# Altium PCB AVCC_PROJECT.PcbDoc
Units mm, origin at the board's own origin, x right, y up, seen from the top; angles counter-clockwise.
Board outline 105.54 x 87.25 mm, 2 copper layers (Top Layer, Bottom Layer); 117 components, 77 nets, 351 pads, 73 vias.
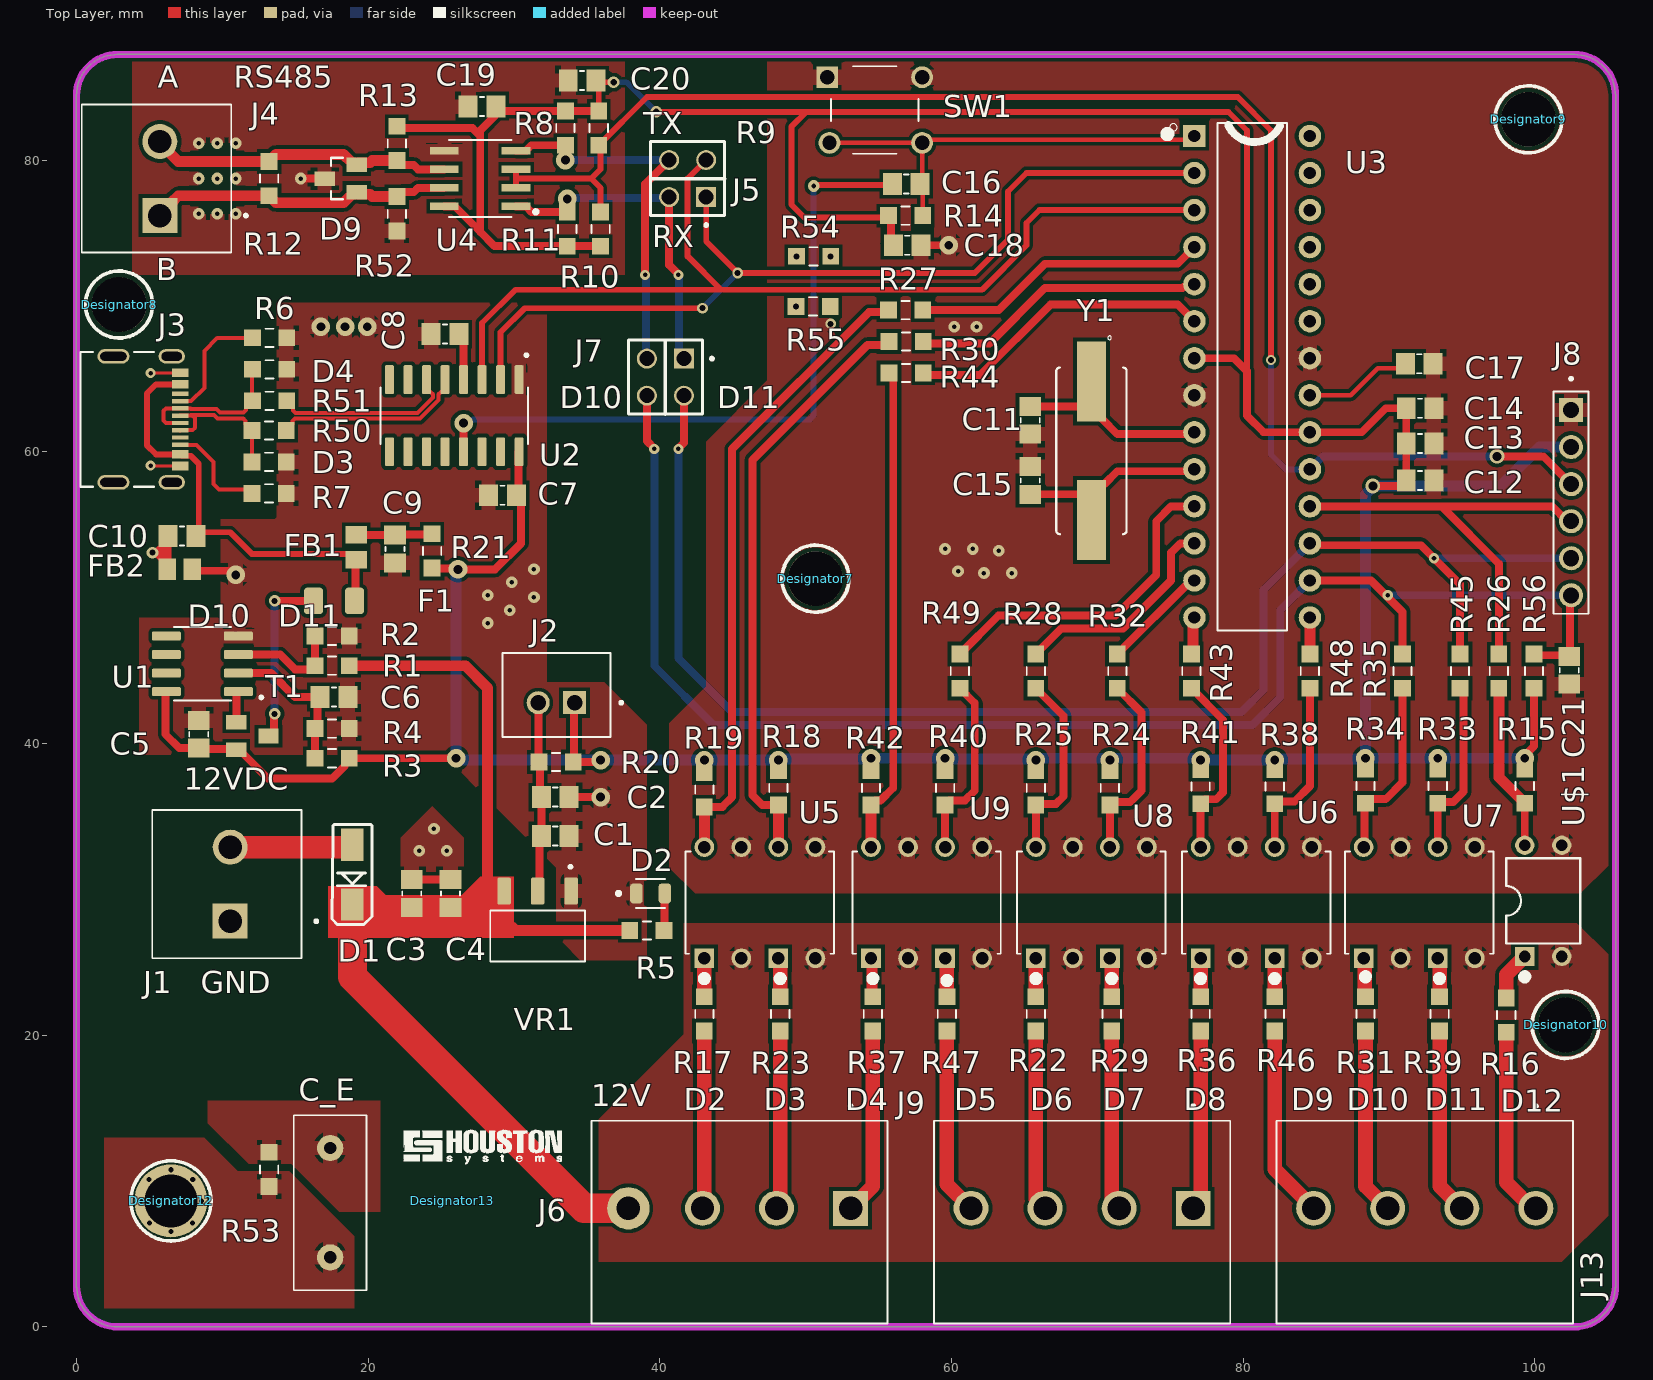
[diagram p0: Top Layer view]
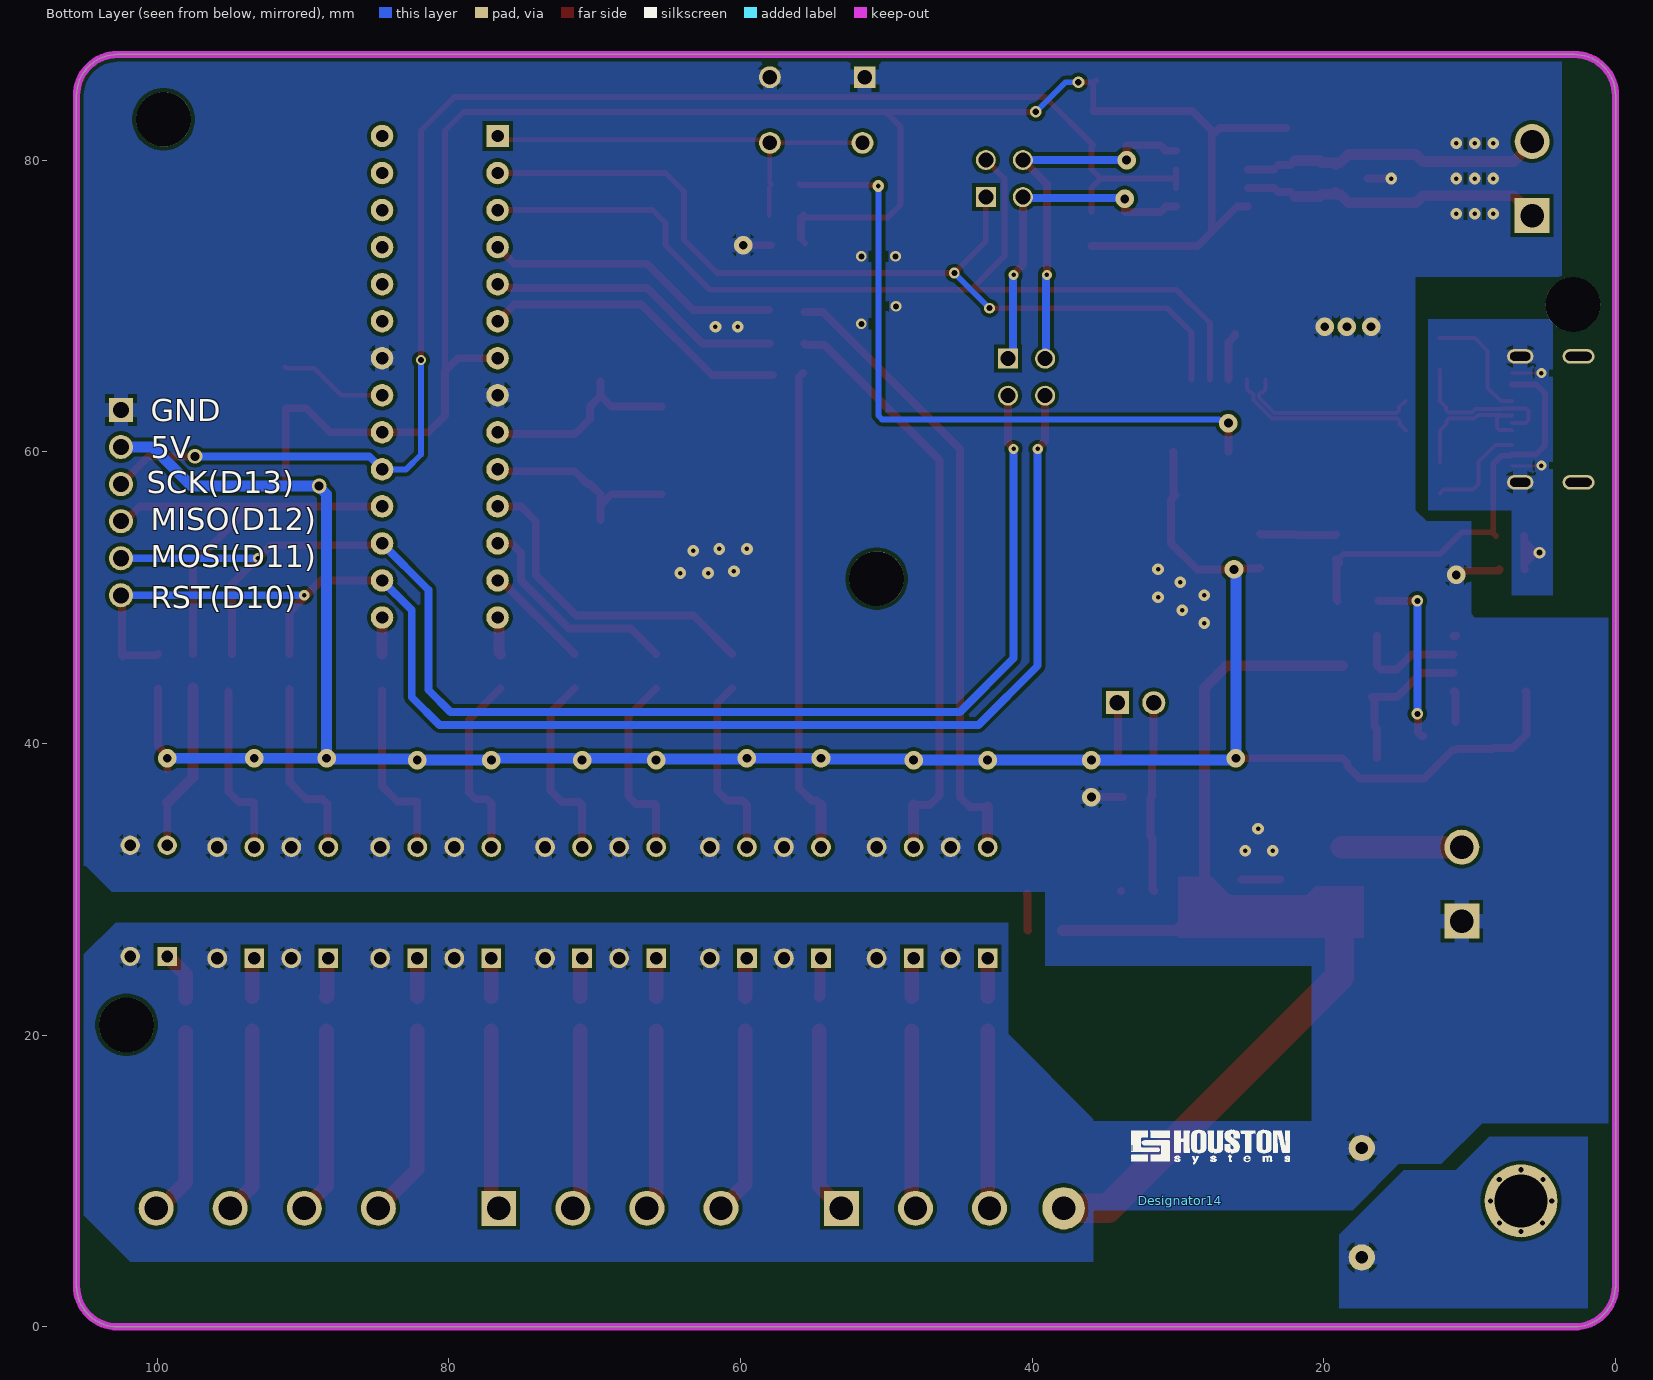
[diagram p1: Bottom Layer view, seen from below]
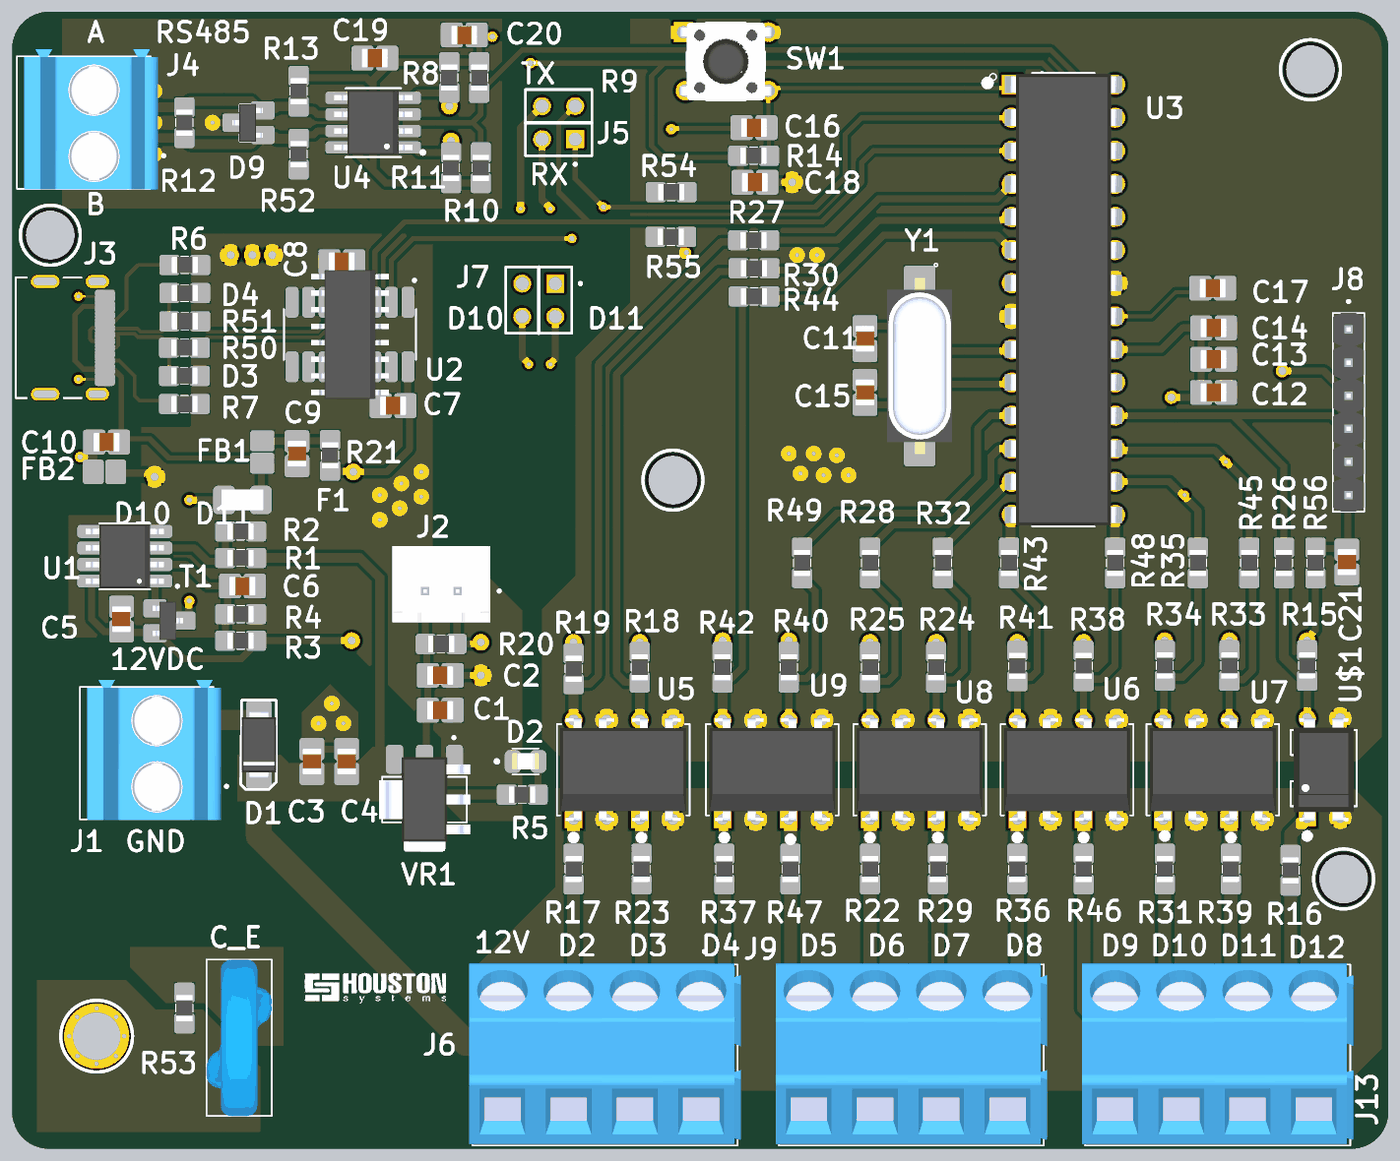
[diagram p2: 3D render of the assembled board from above, using the file's embedded part models]

## Layer stack, top to bottom
Top Solder: solder mask 0.0102, Solder Resist, Dk 3.5
Top Layer: signal copper 0.0356
Dielectric 1: dielectric 0.32, FR-4, Dk 4.8
Bottom Layer: signal copper 0.0356
Bottom Solder: solder mask 0.0102, Solder Resist, Dk 3.5

## Board outline
0,2.815 0,84.434 cw(c2.815,84.434) 2.815,87.249 102.722,87.249 cw(c102.722,84.434) 105.537,84.434 105.537,2.815 cw(c102.722,2.815) 102.722,0 2.815,0 cw(c2.815,2.815)

## Design rules (kind name [scope] priority, off if disabled: settings)
Clearance [All] p1: gap=0.254 ignorepadtopadclearanceinfootprint=FALSE except(0.1: Arc-Arc Arc-Track Arc-SMDPad Track-Track Track-SMDPad SMDPad-SMDPad)
DiffPairsRouting [InDifferentialPairClass('DIFF_90E')] p1: maxlimit=0.127 minlimit=0.127 mostfreqgap=0.127 toplayer_minwidth=0.277 toplayer_maxwidth=0.277 toplayer_prefwidth=0.277 bottomlayer_minwidth=0.277 bottomlayer_maxwidth=0.277 bottomlayer_prefwidth=0.277 impedanceprofiledriven=TRUE impedanceprofileid={61A0B16F-B477-4809-B491-3CA5D92DA443} impedanceprofilevalue=90.000000 maxuncoupledlength=12.7
HoleSize [All] p1: absolutevalues=TRUE maxlimit=5.54 minlimit=0.25 maxpercent=80.000 minpercent=20.000
HoleToHoleClearance [All] p1: gap=0.1 allowstackedmicrovias=TRUE
MinimumSolderMaskSliver [All] p1: minsoldermaskwidth=0.01
PasteMaskExpansion [All] p1: expansion=0.2
PlaneConnect [All] p1: planeconnectstyle=Relief reliefexpansion=0.508 reliefentries=4 reliefconductorwidth=0.454 reliefairgap=0.254
PolygonConnect [All] p1: connectstyle=Relief reliefconductorwidth=1 reliefentries=4 polygonreliefangle="90 Angle" airgapwidth=0.254
RoutingVias [All] p1: holewidth=0.411 width=0.7 viastyle="Through Hole" minholewidth=0.311 minwidth=0.5 maxholewidth=2 maxwidth=2.5
ShortCircuit [All] p1: allowed=TRUE
SilkToSilkClearance [All] p1: silktosilkclearance=0.01
SilkToSolderMaskClearance [IsPad] p1: minsilkscreentomaskgap=0.01 clearancetoexposedcopper=TRUE
SolderMaskExpansion [All] p1: expansion=0.202 istentingtop=FALSE
SupplyNets "Schematic Supply Nets_1" [InNet('GND')] p1: voltage=0.000
SupplyNets "Schematic Supply Nets_5" [InNet('+12')] p2: voltage=0.000
SupplyNets "Schematic Supply Nets_3" [InNet('VUSB')] p3: voltage=0.000
SupplyNets "Schematic Supply Nets_2" [InNet('+5')] p4: voltage=0.000
SupplyNets "Schematic Supply Nets" [InNet('+5DC')] p5: voltage=0.000
Width [All] p1: maxlimit=2 minlimit=0.2 preferedwidth=0.54
21 further rules are at their usual default settings.

## Classes and differential pairs
differential pair class DIFF_90E: USBD V_USBD
component class RS485_3: C11 C12 C13 C14 C15 C17 D9 J4 J5 J6 J9 J13 R8 R9 R10 R11 R12 R13 R15 R16 R17 R18 R19 R22 R23 R24 R25 R26 R28 R29 R31 R32 R33 R34 R35 R36 R37 R38 R39 R40 R41 R42 R43 R45 R46 R47 R48 R49 SW1 U3 U4 U5 U6 U7 U8 U9 U$1 Y1
component class RS485_2: C1 C2 C3 C4 C5 C6 C7 C8 C9 C10 D1 D2 D3 D4 F1 FB1 FB2 J2 J3 R1 R2 R3 R4 R5 R6 R7 R20 R21 R50 R51 T1 U1 U2 VR1
differential pair USBD: +USBD_P -USBD_N
differential pair V_USBD: +V_USBD_P -V_USBD_N

## Components (designator, comment, footprint, x,y, rotation, side; value= is the part's Value field where it differs from the comment)
C1 "CAP CER 10uF 5%" "CAP CER 100pF 5%" 32.827,33.655 r0 top
C2 "CAP CER 100nF 5%" "CAP CER 100pF 5%" 32.827,36.322 r0 top
C3 "CAP CER 10uF 5%" "CAP CER 100pF 5%" 22.987,29.718 r90 top
C4 "CAP CER 100nF 5%" "CAP CER 100pF 5%" 25.654,29.718 r90 top
C5 "CAP CER 100nF 5%" "CAP CER 100pF 5%" 8.382,40.64 r90 top
C6 "CAP CER 100nF 5%" "CAP CER 100pF 5%" 17.653,43.18 r0 top
C7 "CAP CER 100nF 5%" "CAP CER 100pF 5%" 29.21,57.023 r180 top
C8 "CAP CER 10nF 5%" "CAP CER 100pF 5%" 25.273,68.072 r180 top
C9 "CAP CER 100nF 5%" "CAP CER 100pF 5%" 21.844,53.34 r270 top
C10 "CAP CER 100nF 5%" "CAP CER 100pF 5%" 7.239,54.229 r180 top
C11 "CAP CER 22pF 5%" "CAP CER 100pF 5%" 65.405,62.164 r90 top
C12 "CAP CER 100nF 5%" "CAP CER 100pF 5%" 92.136,58.039 r0 top
C13 "CAP CER 100nF 5%" "CAP CER 100pF 5%" 92.136,60.579 r0 top
C14 "CAP CER 100nF 5%" "CAP CER 100pF 5%" 92.136,62.992 r0 top
C15 "CAP CER 22pF 5%" "CAP CER 100pF 5%" 65.405,58.039 r270 top
C16 "CAP CER 100nF 5%" "CAP CER 100pF 5%" 56.896,78.359 r0 top
C17 "CAP CER 100nF 5%" "CAP CER 100pF 5%" 92.075,66.04 r0 top
C18 "CAP CER 100nF 5%" "CAP CER 100pF 5%" 56.962,74.168 r0 top
C19 "CAP CER 10nF 5%" "CAP CER 100pF 5%" 27.813,83.693 r180 top (schematic designator C8)
C20 "CAP CER 10nF 5%" "CAP CER 100pF 5%" 34.671,85.471 r180 top (schematic designator C8)
C21 "CAP CER 100nF 5%" "CAP CER 100pF 5%" 102.362,45.019 r90 top (schematic designator C13)
C_E "Comment" "Ceramic capacitor 3300pF4KV" 17.399,8.509 r270 top
D1 "Diode DO-214AC" "Diode DO-214AC" 18.923,31.006 r90 top
D2 "LED-0805" LED-0805 39.37,29.718 r0 top
D3 "0805" "TVS Diode,Uni-Directional, 4-Pin" 13.208,59.309 r180 top
D4 "0805" "TVS Diode,Uni-Directional, 4-Pin" 13.24,65.659 r180 top
D9 "TVS DIODE SOT-23 SM712-02HTG" "TVS Diode SOT23" 18.118,78.74 r90 top (schematic designator D?)
Designator7 "Comment" "ScrewHole_3.75mmD - duplicate" 50.673,51.308 r0 top
Designator8 "Comment" "ScrewHole_3.75mmD - duplicate" 2.921,70.104 r0 top
Designator9 "Comment" "ScrewHole_3.75mmD - duplicate" 99.568,82.804 r0 top
Designator10 "Comment" "ScrewHole_3.75mmD - duplicate" 102.108,20.701 r0 top
Designator12 "Comment" "EARTHING_VIA HOLE_3.65MM" 6.477,8.636 r0 top
Designator13 "Comment" HOUSTON_LOGO 25.781,8.636 r0 top
Designator14 "Comment" HOUSTON_LOGO 29.845,8.636 r180 bottom
F1 "1206" FUSE 17.661,49.784 r0 top
FB1 "Ferrite Bead" "Ferrite Bead" 19.177,53.467 r270 top
FB2 "Ferrite Bead" "Ferrite Bead" 7.083,51.943 r180 top
J1 "Comment" "Terminal Block Connector" 10.541,27.813 r90 top
J2 "2.54mm" JST_2PIN 32.913,43.324 r0 top
J3 "USB Type C" "USB Type C MOLEX" 3.683,62.23 r270 top
J4 "Connector 5.08 mm" "Connector 5.08 mm" 5.715,76.2 r90 top
J5 "4X2 PIN" "4PIN BURGE" 43.18,77.47 r90 top
J6 "4PIN 5.08MM" "TERMINSL SCREW"#1 53.086,8.128 r180 top
J7 "4X2 PIN" "4PIN BURGE" 41.655,66.392 r180 top (schematic designator J5)
J8 "BERGE 6 PIN 2.54mm" "BERGE 6 PIN 2.54mm" 102.489,56.515 r270 top (schematic designator J5)
J9 "4PIN 5.08MM" "TERMINSL SCREW"#2 76.581,8.128 r180 top
J13 "4PIN 5.08MM" "TERMINSL SCREW"#3 100.076,8.128 r180 top
R1 "RES 0805 10K 5%" "RES 0805 10K 5%" 17.526,45.339 r0 top
R2 "RES 0805 10K 5%" "RES 0805 10K 5%" 17.526,47.371 r180 top
R3 "RES 0805 4.3K 5%" "RES 0805 10K 5%" 17.526,38.989 r180 top
R4 "RES 0805 10K 5%" "RES 0805 10K 5%" 17.526,41.021 r180 top
R5 "RES 0805 1K 5%" "RES 0805 10K 5%" 39.116,27.178 r0 top
R6 "RES 0805 5.1K 5%" "RES 0805 10K 5%" 13.24,67.818 r180 top
R7 "RES 0805 5.1K 5%" "RES 0805 10K 5%" 13.208,57.15 r0 top
R8 "RES 0805 10K 5%" "RES 0805 10K 5%" 33.528,82.201 r90 top
R9 "RES 0805 10K 5%" "RES 0805 10K 5%" 35.814,82.201 r90 top
R10 "RES 0805 10K 5%" "RES 0805 10K 5%" 35.941,75.279 r270 top
R11 "RES 0805 10K 5%" "RES 0805 10K 5%" 33.655,75.279 r270 top
R12 "RES 0805 120E 5%" "RES 0805 10K 5%" 13.208,78.74 r90 top
R13 "RES 0805 20K 5%" "RES 0805 10K 5%" 21.971,81.153 r270 top
R14 "RES 0805 10K 5%" "RES 0805 10K 5%" 56.864,76.2 r0 top
R15 "RES 0805 10K 5%" "RES 0805 10K 5%" 99.314,37.084 r90 top
R16 "RES 0805 1K 5%" "RES 0805 10K 5%" 98.044,21.368 r90 top
R17 "RES 0805 1K 5%" "RES 0805 10K 5%" 43.053,21.463 r90 top
R18 "RES 0805 10K 5%" "RES 0805 10K 5%" 48.133,36.957 r90 top
R19 "RES 0805 10K 5%" "RES 0805 10K 5%" 43.053,36.83 r90 top
R20 "RES 0805 0E 5%" "RES 0805 10K 5%" 32.893,38.735 r0 top
R21 "RES 0805 0E 5%" "RES 0805 10K 5%" 24.384,53.213 r90 top
R22 "RES 0805 1K 5%" "RES 0805 10K 5%" 65.786,21.463 r270 top
R23 "RES 0805 1K 5%" "RES 0805 10K 5%" 48.26,21.463 r90 top
R24 "RES 0805 10K 5%" "RES 0805 10K 5%" 70.866,36.957 r90 top
R25 "RES 0805 10K 5%" "RES 0805 10K 5%" 65.786,36.957 r90 top
R26 "RES 0805 0E 5%" "RES 0805 10K 5%" 97.536,44.958 r270 top
R27 "RES 0805 0E 5%" "RES 0805 10K 5%" 56.864,69.723 r180 top
R28 "RES 0805 0E 5%" "RES 0805 10K 5%" 65.786,44.958 r270 top
R29 "RES 0805 1K 5%" "RES 0805 10K 5%" 70.993,21.463 r270 top
R30 "RES 0805 0E 5%" "RES 0805 10K 5%" 56.896,67.564 r180 top
R31 "RES 0805 1K 5%" "RES 0805 10K 5%" 88.392,21.463 r270 top
R32 "RES 0805 0E 5%" "RES 0805 10K 5%" 71.374,44.958 r270 top
R33 "RES 0805 10K 5%" "RES 0805 10K 5%" 93.345,37.084 r90 top
R34 "RES 0805 10K 5%" "RES 0805 10K 5%" 88.392,37.084 r90 top
R35 "RES 0805 0E 5%" "RES 0805 10K 5%" 90.932,44.958 r270 top
R36 "RES 0805 1K 5%" "RES 0805 10K 5%" 77.089,21.463 r90 top
R37 "RES 0805 1K 5%" "RES 0805 10K 5%" 54.61,21.463 r90 top
R38 "RES 0805 10K 5%" "RES 0805 10K 5%" 82.169,37.052 r90 top
R39 "RES 0805 1K 5%" "RES 0805 10K 5%" 93.472,21.463 r270 top
R40 "RES 0805 10K 5%" "RES 0805 10K 5%" 59.563,36.957 r90 top
R41 "RES 0805 10K 5%" "RES 0805 10K 5%" 77.089,37.052 r90 top
R42 "RES 0805 10K 5%" "RES 0805 10K 5%" 54.483,36.957 r90 top
R43 "RES 0805 0E 5%" "RES 0805 10K 5%" 76.454,44.958 r270 top
R44 "RES 0805 0E 5%" "RES 0805 10K 5%" 56.896,65.405 r180 top
R45 "RES 0805 0E 5%" "RES 0805 10K 5%" 94.869,44.958 r270 top
R46 "RES 0805 1K 5%" "RES 0805 10K 5%" 82.169,21.463 r90 top
R47 "RES 0805 1K 5%" "RES 0805 10K 5%" 59.69,21.463 r270 top
R48 "RES 0805 0E 5%" "RES 0805 10K 5%" 84.582,44.958 r270 top
R49 "RES 0805 0E 5%" "RES 0805 10K 5%" 60.579,44.958 r270 top
R50 "RES 0805 22E 5%" "RES 0805 10K 5%" 13.208,61.468 r0 top
R51 "RES 0805 22E 5%" "RES 0805 10K 5%" 13.24,63.5 r0 top
R52 "RES 0805 20K 5%" "RES 0805 10K 5%" 21.971,76.327 r90 top (schematic designator R13)
R53 "RES 0805 1K 5%" "RES 0805 10K 5%" 13.208,10.795 r90 top (schematic designator R17)
R54 "RES 0805 10K 5%" "RES 0805 10K 5%" 50.546,73.406 r180 top (schematic designator R18)
R55 "RES 0805 10K 5%" "RES 0805 10K 5%" 50.514,69.977 r180 top (schematic designator R18)
R56 "RES 0805 0E 5%" "RES 0805 10K 5%" 99.949,44.958 r270 top (schematic designator R26)
SW1 "PUSH BUTTON" "Push Button" 54.737,83.439 r0 top
T1 "P-MOS SI2301" PMOS_SOT23 12.065,40.513 r270 top
U1 "SOIC-8" OPAMP 8.636,45.466 r180 top
U2 "HC340C" HC340C 25.908,62.484 r270 top
U3 "ATMEGA328P-PU" "ATMEGA328P DIP28" 80.622,65.151 r0 top
U4 "MAX485CSA-RS-485/RS-422 Transceivers" "MAX485CSA-RS-485/RS-422 Transceivers" 27.686,78.74 r180 top
U5 "OPTOCOUPLER" OPTOCOUPLER 46.863,29.083 r90 top
U6 "OPTOCOUPLER" OPTOCOUPLER 69.596,29.083 r90 top
U7 "OPTOCOUPLER" OPTOCOUPLER 92.075,29.083 r90 top
U8 "OPTOCOUPLER" OPTOCOUPLER 80.899,29.083 r90 top
U9 "OPTOCOUPLER" OPTOCOUPLER 58.293,29.083 r90 top
U$1 "Optoc_4pin" Optoisolator 100.584,29.21 r0 top
VR1 "LM1117IMPX-5.0" LM1117IMPX-5.0 31.623,26.797 r270 top
Y1 "Crystal 16 Mhz SMD" "Crystal 16 Mhz SMD" 69.596,60.071 r270 top

## Footprints (in the part's own frame and the unit in brackets; to place one, negate y for a bottom-side part, rotate by r counter-clockwise, add the part's x,y. Pads: shape width x height; smd on the part's side, far side on the other; paste and mask are expansions set on the pad)
"4PIN BURGE" [mm] "Connector Header Through Hole 4 position 0.100 (2.54mm), 4X2 PIN"
  rect 1.37x1.37 hole 1.02: 01(0,0)
  round 1.37 hole 1.02: 02(0,2.54) 03(2.54,0) 04(2.54,2.54)
  silkscreen extent -2.02,-1.27 3.81,3.81
"ATMEGA328P DIP28" [mm] "ATMEGA328P DIP28 DIP794W46P254L2967H457Q28B"
  rect 1.54x1.54 hole 0.85: 1(-3.96,16.51)
  round 1.54 hole 0.85: 2(-3.96,13.97) 3(-3.96,11.43) 4(-3.96,8.89) 5(-3.96,6.35) 6(-3.96,3.81) 7(-3.96,1.27) 8(-3.96,-1.27) 9(-3.96,-3.81) 10(-3.96,-6.35) 11(-3.96,-8.89) 12(-3.96,-11.43) 13(-3.96,-13.97) 14(-3.96,-16.51) 15(3.96,-16.51) 16(3.96,-13.97) 17(3.96,-11.43) 18(3.96,-8.89) 19(3.96,-6.35) 20(3.96,-3.81) 21(3.96,-1.27) 22(3.96,1.27) 23(3.96,3.81) 24(3.96,6.35) 25(3.96,8.89) 26(3.96,11.43) 27(3.96,13.97) 28(3.96,16.51)
  silkscreen extent -5.65,-17.4 2.38,17.4, body extent -5.08,-17.34 5.08,17.34, height 4.57
"BERGE 6 PIN 2.54mm" [mm] "BERGE 6 PIN 2.54mm, AMPHENOL_68604-406HLF"
  rect 1.65x1.65 / inner round 1.65 / far side rect 1.65x1.65 hole 1.1: 1(-6.35,0)
  round 1.65 hole 1.1: 2(-3.81,0) 3(-1.27,0) 4(1.27,0) 5(3.81,0) 6(6.35,0)
  silkscreen extent -8.6,-1.2 7.62,1.2, body extent -7.62,-1.2 7.62,1.2, height 12.19
"CAP CER 100pF 5%" [mm] "CAP CER 100PF50V X7R 0805"
  rect 1.3x1.5 smd: 1(-0.95,0) 2(0.95,0)
  silkscreen extent -0.15,-0.65 0.15,0.65, body extent -1,-0.72 1,0.72, height 1.22
"Ceramic capacitor 3300pF4KV" [mm] "Ceramic capacitor 3300pF4KV, Tension nominale 400Vac(r.m.s.), 4KV ESD, DE2E3SA332MA3BY02F"
  round 1.8 hole 0.85: 1(-3.75,0) 2(3.75,0)
  silkscreen extent -6,-2.5 6,2.5, body extent -6,-2.5 6,2.5, height 15
"Connector 5.08 mm" [mm] "MOLEX,Screw Type, Horizontal, 5.08 Pitch, 24~12 (AWG), Terminal Block Connector"
  rect 2.4x2.4 / inner round 2.4 / far side rect 2.4x2.4 hole 1.6: 1(0,0)
  round 2.4 hole 1.6: 2(5.08,0)
  silkscreen extent -2.54,-6 7.62,5.35, body extent -2.59,-5.46 8.17,4.79, height 14
"Crystal 16 Mhz SMD" [mm] "16 Mhz Crystal SMD –CSM-4ALX(28ALX) 12.5mmX4.85mmX4mm"
  rect 5.5x2 smd: 1(-4.75,0) 2(4.75,0)
  silkscreen extent -7.88,-2.41 5.72,2.41, body extent -6.75,-2.5 6.75,2.5, height 4.5
"Diode DO-214AC" [mm] "Diode Standard 100 V 1A Surface Mount DO-214AC (SMA)"
  rect 2.2x1.55 smd: 1(-2.05,0) 2(2.05,0)
  silkscreen extent -3.43,-1.33 3.43,1.4, body extent -2.55,-1.33 2.55,1.33, height 2.29
"EARTHING_VIA HOLE_3.65MM" [mm] "EARTHING VIA HOLE 3.65MM"
  round 0.45 hole 0.35: 2(-2.108,0) 2(-1.499,1.473) 2(-1.473,-1.524) 2(0,-2.108) 2(0,2.134) 2(1.473,-1.524) 2(1.499,1.473) 2(2.108,0)
  round 5 hole 3.65: 2(0,0)
  silkscreen extent -2.75,-2.75 2.75,2.75
"Ferrite Bead" [mm] "Ferrite Bead 0805"
  rect 1.2x1.47 smd: 1(-0.86,0) 2(0.86,0)
FUSE [mm] "C1H25 .5 A 125 V AC 32 V DC Fuse Board Mount (Cartridge Style Excluded) Surface Mount 1206 (3216 Metric)"
  rrect30% 1.3x1.8 smd: 1(-1.405,0) 2(1.405,0)
  body extent -1.6,-0.79 1.6,0.79, height 0.85
HC340C [mm] "FTDI 16-SOIC"
  rrect25% 1.97x0.6 smd: 1(-2.475,4.445) 2(-2.475,3.175) 3(-2.475,1.905) 4(-2.475,0.635) 5(-2.475,-0.635) 6(-2.475,-1.905) 7(-2.475,-3.175) 8(-2.475,-4.445) 9(2.475,-4.445) 10(2.475,-3.175) 11(2.475,-1.905) 12(2.475,-0.635) 13(2.475,0.635) 14(2.475,1.905) 15(2.475,3.175) 16(2.475,4.445)
  silkscreen extent -4.24,-5.06 1.95,5.06, body extent -3,-4.95 3,4.95, height 1.75
HOUSTON_LOGO [mm]
  silkscreen extent -3.35,2.52 7.49,4.87
JST_2PIN [mm] "B2B-XH-A(LF)(SN),Connector Header Through Hole 3 position 0.098 (2.50mm)Connector Header Through Hole 2 position 0.098 (2.50mm)"
  rect 1.575x1.575 / inner round 1.575 / far side rect 1.575x1.575 hole 1.05: 1(1.25,-0.525)
  round 1.575 hole 1.05: 2(-1.25,-0.525)
  silkscreen extent -3.7,-2.88 4.54,2.88, body extent -3.7,-2.88 3.7,2.88, height 7
LED-0805 [mm] "Red 640nm LED Indication - Discrete 1.85V 0805 (2012 Metric)"
  rrect50% 0.86x1.36 smd: A(0.975,0) C(-0.975,0)
  silkscreen extent -2.3,-0.99 1,0.99, body extent -1,-0.63 1,0.63, height 0.75
LM1117IMPX-5.0 [mm]
  rrect25% 1.84x0.93 smd: 1(-3.085,2.3) 2(-3.085,0) 3(-3.085,-2.3)
  rrect25% 1.84x3.19 on Top Overlay: 4(3.085,0)
  silkscreen extent -4.85,-3.25 1.75,3.25, body extent -3.5,-3.25 3.5,3.25, height 1.8
"MAX485CSA-RS-485/RS-422 Transceivers" [mil] "Low-Power, Slew-Rate-Limited RS-485/RS-422 Transceivers, SOIC-8"
  rect 78x21 smd: 1(-97,75) 2(-97,25) 3(-97,-25) 4(-97,-75) 5(97,-75) 6(97,-25) 7(97,25) 8(97,75)
  silkscreen extent -84,-104 84,104, body extent -118,-96 118,96, height 69
OPAMP [mm] "LMV342MA,Dual, 5.5-V, 1-MHz, high output current (75-mA) op amp,SOIC-8"
  rrect25% 1.97x0.6 smd: 1(-2.47,1.905) 2(-2.47,0.635) 3(-2.47,-0.635) 4(-2.47,-1.905) 5(2.47,-1.905) 6(2.47,-0.635) 7(2.47,0.635) 8(2.47,1.905)
  silkscreen extent -4.14,-2.52 1.95,2.52, body extent -3,-2.45 3,2.45, height 1.75
OPTOCOUPLER [mm] "TLP521-2,Optoisolateur Ã  sortie transistor 5300 Vrms 2 canaux 8 DIP"
  rect 1.35x1.35 / inner round 1.35 / far side rect 1.35x1.35 hole 0.85: 1(-3.81,3.81)
  round 1.35 hole 0.85: 2(-3.81,1.27) 4(-3.81,-3.81) 5(3.81,-3.81) 6(3.81,-1.27) 7(3.81,1.27) 8(3.81,3.81)
  rect 1.35x1.35 hole 0.85: 3(-3.81,-1.27)
  silkscreen extent -5.31,-5.09 3.5,5.09, body extent -3.94,-4.83 3.94,4.83, height 4.85
Optoisolator [mil] "TLP521-1,Optoisolator Transistor Output 5300Vrms 1 Channel 4-DIP"
  rect 52x52 hole 32: 1(-50,-150)
  round 52 hole 32: 2(50,-150) 3(50,150) 4(-50,150)
  silkscreen extent -100,-115 100,115, body extent -91,-160 91,150, height 197
PMOS_SOT23 [mm] "MOSFET P-CH 20V 2.2A SOT23-3"
  rect 1x1.4 smd: 1(-0.95,-1.1) 2(0.95,-1.1) 3(0,1.1)
  body extent -1.46,-1.31 1.46,1.06, height 1.25
"Push Button" [mm] "Switch Push Button OFF (ON) SPST Round Button 0.05A 24VDC Momentary Contact PC Pins Thru-Hole"
  rect 1.498x1.498 / inner round 1.498 / far side rect 1.498x1.498 hole 0.99: 1(-3.25,2.25)
  round 1.498 hole 0.99: 2(3.25,2.25) 3(-3.1,-2.25) 4(3.25,-2.25)
  silkscreen extent -3,-3 3,3, body extent -3.9,-3 3.9,3, height 17.01
"RES 0805 10K 5%" [mm] "RESISTOR, THICK FILM, 10K, 5%, 0805, FRESISTOR, THICK FILM, 10K, 5%, 0805, FULL REEL Product Range:PANASONIC - ERJ Series"
  rect 1.15x1.15 smd: 1(-1.175,0) 2(1.175,0)
  silkscreen extent -0.28,-0.63 0.28,0.63, body extent -1,-0.63 1,0.63, height 0.7
"ScrewHole_3.75mmD - duplicate" [mm] "SCREW HEAD DIA 4.5MM, SREW LEG DIA 3 MM"
  round 3.75 hole 3.75 unplated: 1(0,0)
  silkscreen extent -2.3,-2.3 2.3,2.3
"Terminal Block Connector" [mm] "MOLEX,Screw Type, Horizontal, 5.08 Pitch, 24~12 (AWG), Terminal Block Connector"
  rect 2.4x2.4 / inner round 2.4 / far side rect 2.4x2.4 hole 1.6: 1(0,0)
  round 2.4 hole 1.6: 2(5.08,0)
  silkscreen extent -2.54,-6 7.62,5.35, body extent -2.59,-5.46 8.17,4.79, height 14
"TERMINSL SCREW"#1 [mm] "TERMINSL SCREW, 4PIN, 5.08MM"
  rect 2.4x2.4 / inner round 2.4 / far side rect 2.4x2.4 hole 1.6: 1(0,0)
  round 2.4 hole 1.6: 2(5.08,0) 3(10.16,0)
  round 2.9 hole 1.6: 4(15.24,0)
  silkscreen extent -2.54,-7.1 17.78,7.89, body extent -2.79,-6.1 18.03,7.79, height 15.82
"TERMINSL SCREW"#2 [mm] "TERMINSL SCREW, 4PIN, 5.08MM"
  rect 2.4x2.4 / inner round 2.4 / far side rect 2.4x2.4 hole 1.6: 1(0,0)
  round 2.4 hole 1.6: 2(5.08,0) 3(10.16,0) 4(15.24,0)
  silkscreen extent -2.54,-7.1 17.78,7.89, body extent -2.79,-6.1 18.03,7.79, height 15.82
"TERMINSL SCREW"#3 [mm] "TERMINSL SCREW, 4PIN, 5.08MM"
  round 2.4 hole 1.6: 1(0,0) 2(5.08,0) 3(10.16,0) 4(15.24,0)
  silkscreen extent -2.54,-7.1 17.78,7.89, body extent -2.79,-6.1 18.03,7.79, height 15.82
"TVS Diode SOT23" [mm] "TVS Diode, SM712 Series, 31V Clamp, 600W Peak Pulse, Surface Mount,Bi-Directional, SOT23-3"
  rect 1x1.4 smd: 1(-0.95,-1.1) 2(0.95,-1.1) 3(0,1.1)
  silkscreen extent -1.42,-0.15 1.42,0.66, body extent -1.47,-1.13 1.45,1.24, height 1.12
"TVS Diode,Uni-Directional, 4-Pin" [mm] "TVS Diode,Uni-Directional,5V, 0805"
  rect 1.15x1.15 smd: 1(-1.175,0) 2(1.175,0)
  silkscreen extent -0.28,-0.63 0.28,0.63, body extent -1,-0.63 1,0.63, height 0.7
"USB Type C MOLEX" [mm] "USB Type C MOLEX_2171790001"
  rect 0.59x1.15 smd mask+0.064: A1B12(-3.2,3.425) A4B9(-2.4,3.425) B1A12(3.2,3.425) B4A9(2.4,3.425)
  rect 0.298x1.15 smd mask+0.064: A5(-1.25,3.425) A6(-0.25,3.425) A7(0.25,3.425) A8(1.25,3.425) B5(1.75,3.425) B6(0.75,3.425) B7(-0.75,3.425) B8(-1.75,3.425)
  oval 1x2.2 hole 0.6 slot 1.8 at 90 deg mask+0.064: SH1(-4.32,-1.15) SH2(4.32,-1.15)
  oval 1x1.8 hole 0.6 slot 1.4 at 90 deg mask+0.064: SH3(-4.32,2.85) SH4(4.32,2.85)
  silkscreen extent -4.62,-3.4 4.62,1.63

## Part data
C1 C2 C3 C4 C5 C6 C7 C8 C9 C10 C11 C12 C13 C14 C15 C16 C17 C18 C19 C20 C21: library part "CAP CER 100pF 5%", "CAP CER 100PF50V X7R 0805", Package=None, Availability=Unavailable, MP=GCJ216R71H222KA01D, Price=None
D1: "Diode Standard 100 V 1A Surface Mount DO-214AC (SMA)", Package="DO-214 Vishay Semiconductor", Check_prices=https://www.snapeda.com/parts/S1B-E3/61T/Vishay/view-part/?ref=eda, MF="Vishay Semiconductor", MP=S1B-E3/61T, SnapEDA_Link=https://www.snapeda.com/parts/S1B-E3/61T/Vishay/view-part/?ref=snap
D2: "Red 640nm LED Indication - Discrete 1.85V 0805 (2012 Metric)", Package="0805 Kingbright", Check_prices=https://www.snapeda.com/parts/APT2012SRCPRV/Kingbright/view-part/?ref=eda, MF=Kingbright, MP=APT2012SRCPRV, SnapEDA_Link=https://www.snapeda.com/parts/APT2012SRCPRV/Kingbright/view-part/?ref=snap
D3 D4: library part "TVS Diode", "Nexperia PRTR5V0U2X,215, Dual-Element Uni-Directional TVS Diode, 0805, 5V", Package="TO-253-4 Nexperia USA Inc.", Availability="In Stock", Check_prices=https://www.snapeda.com/parts/PRTR5V0U2X/NXP+Semiconductors/view-part/?ref=eda, MF="NXP Semiconductors", MP=PRTR5V0U2X, Price=None, Purchase-URL=https://pricing.snapeda.com/search/part/PRTR5V0U2X/?ref=eda, SnapEDA_Link=https://www.snapeda.com/parts/PRTR5V0U2X/NXP+Semiconductors/view-part/?ref=snap
D9: "TVS Diode, SM712 Series, 31V Clamp, 600W Peak Pulse, Surface Mount,Bi-Directional, SOT23-3", Package="SOT-23 Littelfuse Inc.", Check_prices=https://www.snapeda.com/parts/SM712-02HTG/Littelfuse/view-part/?ref=eda, MF="Littelfuse Inc.", MP=SM712-02HTG, SnapEDA_Link=https://www.snapeda.com/parts/SM712-02HTG/Littelfuse/view-part/?ref=snap
F1: library part FUSE, "C1H25 .5 A 125 V AC 32 V DC Fuse Board Mount (Cartridge Style Excluded) Surface Mount 1206 (3216 Metric)", Package="1206 Bel Fuse Inc.", Check_prices=https://www.snapeda.com/parts/C1H25/Bel+Circuit+Protection/view-part/?ref=eda, MF="Bel Fuse", MP=C1H25, SnapEDA_Link=https://www.snapeda.com/parts/C1H25/Bel+Circuit+Protection/view-part/?ref=snap
FB1 FB2: "Ferrite Bead 0805", Package=None, Availability=Unavailable, MP=MPZ2012S102AT000, Price=None
J2: library part JST_2PIN, "B2B-XH-A(LF)(SN),Connector Header Through Hole 3 position 0.098 (2.50mm)Connector Header Through Hole 2 position 0.098 (2.50mm)", Package=None, Check_prices=https://www.snapeda.com/parts/B2B-XH-A(LF)(SN)/JST/view-part/?ref=eda, MF="JST Sales", MP=B2B-XH-A(LF)(SN), SnapEDA_Link=https://www.snapeda.com/parts/B2B-XH-A(LF)(SN)/JST/view-part/?ref=snap
J3: "USB Type C - Connector, Top-mount SMT, 16pos", Package=None, Check_prices=https://www.snapeda.com/parts/217179-0001/Molex/view-part/?ref=eda, MF=Molex, MP=217179-0001, SnapEDA_Link=https://www.snapeda.com/parts/217179-0001/Molex/view-part/?ref=snap
J4: "MOLEX,Screw Type, Horizontal, 5.08 Pitch, 24~12 (AWG), Terminal Block Connector", Package=None, Check_prices=https://www.snapeda.com/parts/TB007-508-02BE/Same+Sky/view-part/?ref=eda, MF="Same Sky", MP=TB007-508-02BE, SnapEDA_Link=https://www.snapeda.com/parts/TB007-508-02BE/Same+Sky/view-part/?ref=snap
J5 J7: library part "4PIN BURGE", "Connector Header Through Hole 4 position 0.100 (2.54mm), 4X2 PIN", Package=None, Check_prices=https://www.snapeda.com/parts/MTLW-102-05-G-D-180/Samtec/view-part/?ref=eda, MF=Samtec, MP=MTLW-102-05-G-D-180, SnapEDA_Link=https://www.snapeda.com/parts/MTLW-102-05-G-D-180/Samtec/view-part/?ref=snap
J6 J9 J13: library part "TERMINSL SCREW", "TERMINSL SCREW, 4PIN, 5.08MM", Package=None, Availability=Unavailable, MF="{'manufacturer': u'Phoenix Contact'}", MP=1995664, Price=None
J8: "BergStik, Board to Board connector, Unshrouded Vertical Header, Through Hole, Single Row, 6 Positions, 2.54 mm (0.100in) Pitch. 68604-406HLF", Package=None, Check_prices=https://www.snapeda.com/parts/68604-406HLF/Amphenol/view-part/?ref=eda, MF="AMPHENOL ICC / FCI", MP=68604-406HLF, SnapEDA_Link=https://www.snapeda.com/parts/68604-406HLF/Amphenol/view-part/?ref=snap
R1 R2 R4 R8 R9 R10 R11 R14 R15 R18 R19 R24 R25 R33 R34 R38 R40 R41 R42 R54 R55: "RESISTOR, THICK FILM, 10K, 5%, 0805, FRESISTOR, THICK FILM, 10K, 5%, 0805, FULL REEL Product Range:PANASONIC - ERJ Series", Package="805-2 Panasonic", Availability="In Stock", Check_prices=https://www.snapeda.com/parts/ERJ-6GEYJ103V/Panasonic+Electronic+Components/view-part/?ref=eda, MF="Panasonic Electronic", MP=ERJ-6GEYJ103V, Price=None, Purchase-URL=https://pricing.snapeda.com/search/part/ERJ-6GEYJ103V/?ref=eda, SnapEDA_Link=https://www.snapeda.com/parts/ERJ-6GEYJ103V/Panasonic+Electronic+Components/view-part/?ref=snap
R3 R5 R6 R7 R12 R13 R16 R17 R20 R21 R22 R23 R26 R27 R28 R29 R30 R31 R32 R35 R36 R37 R39 R43 R44 R45 R46 R47 R48 R49 R50 R51 R52 R53 R56: library part "RES 0805 10K 5%", "RESISTOR, THICK FILM, 10K, 5%, 0805, FRESISTOR, THICK FILM, 10K, 5%, 0805, FULL REEL Product Range:PANASONIC - ERJ Series", Package="805-2 Panasonic", Availability="In Stock", Check_prices=https://www.snapeda.com/parts/ERJ-6GEYJ103V/Panasonic+Electronic+Components/view-part/?ref=eda, MF="Panasonic Electronic", MP=ERJ-6GEYJ103V, Price=None, Purchase-URL=https://pricing.snapeda.com/search/part/ERJ-6GEYJ103V/?ref=eda, SnapEDA_Link=https://www.snapeda.com/parts/ERJ-6GEYJ103V/Panasonic+Electronic+Components/view-part/?ref=snap
SW1: "Switch Push Button OFF (ON) SPST Round Button 0.05A 24VDC Momentary Contact PC Pins Thru-Hole", Package=None, Check_prices=https://www.snapeda.com/parts/3-1825910-1/TE+Connectivity+ALCOSWITCH+Switches/view-part/?ref=eda, MF="TE Connectivity", MP=3-1825910-1, SnapEDA_Link=https://www.snapeda.com/parts/3-1825910-1/TE+Connectivity+ALCOSWITCH+Switches/view-part/?ref=snap
T1: "MOSFET P-CH 20V 2.2A SOT23-3", Package="SOT-23 MCC", Check_prices=https://www.snapeda.com/parts/SI2301/Micro+Commercial+Components/view-part/?ref=eda, MF="Micro Commercial Components (MCC)", MP=SI2301, SnapEDA_Link=https://www.snapeda.com/parts/SI2301/Micro+Commercial+Components/view-part/?ref=snap
U1: library part OPAMP, "LMV342MA,Dual, 5.5-V, 1-MHz, high output current (75-mA) op amp,SOIC-8", Package="SOIC-8 Texas Instruments", Check_prices=https://www.snapeda.com/parts/LMV342MAX/NOPB/Texas+Instruments/view-part/?ref=eda, MF="Texas Instruments", MP=LMV342MAX/NOPB, SnapEDA_Link=https://www.snapeda.com/parts/LMV342MAX/NOPB/Texas+Instruments/view-part/?ref=snap
U2: "FTDI 16-SOIC", Package="SOIC-16 ON Semiconductor", Check_prices=https://www.snapeda.com/parts/74HC595D/Toshiba/view-part/?ref=eda, MF=Toshiba, MP=74HC595D, SnapEDA_Link=https://www.snapeda.com/parts/74HC595D/Toshiba/view-part/?ref=snap
U3: "ATmega Series 20 MHz 32 KB Flash 2 KB SRAM 8-Bit Microcontroller - DIP-28", Package=None, Availability=Unavailable, MP=ATMEGA328P-PU, Price=None
U4: "Low-Power, Slew-Rate-Limited RS-485/RS-422 Transceivers", Package="SOIC-8 Maxim", Check_prices=https://www.snapeda.com/parts/MAX485CSA+/Analog+Devices/view-part/?ref=eda, MF="Analog Devices", MP=MAX485CSA+, SnapEDA_Link=https://www.snapeda.com/parts/MAX485CSA+/Analog+Devices/view-part/?ref=snap
U5 U6 U7 U8 U9: "TLP521-2,Optoisolateur Ã  sortie transistor 5300 Vrms 2 canaux 8 DIP", Package="DIP-8 Toshiba", Check_prices=https://www.snapeda.com/parts/TLP521-2/Toshiba/view-part/?ref=eda, MF=Toshiba, MP=TLP521-2, SnapEDA_Link=https://www.snapeda.com/parts/TLP521-2/Toshiba/view-part/?ref=snap
U$1: "TLP521-1,Optoisolator Transistor Output 5300Vrms 1 Channel 4-DIP", Package="DIP-4 Isocom Components", Check_prices=https://www.snapeda.com/parts/TLP521-1/Isocom/view-part/?ref=eda, MF=Isocom, MP=TLP521-1, SnapEDA_Link=https://www.snapeda.com/parts/TLP521-1/Isocom/view-part/?ref=snap
VR1: "800-mA 15-V linear voltage regulator", Package="SOT-223-4 Texas Instruments", Check_prices=https://www.snapeda.com/parts/LM1117IMPX-5.0/NOPB/Texas+Instruments/view-part/?ref=eda, MF="Texas Instruments", MP=LM1117IMPX-5.0/NOPB, SnapEDA_Link=https://www.snapeda.com/parts/LM1117IMPX-5.0/NOPB/Texas+Instruments/view-part/?ref=snap
Y1: "16 Mhz Crystal SMD –CSM-4ALX(28ALX) 12.5mmX4.85mmX4mm", Package="HC49SD Fox Electronics", Check_prices=https://www.snapeda.com/parts/FOXSDLF/128-20/Fox+Electronics/view-part/?ref=eda, MF="Fox Electronics", MP=FOXSDLF/128-20, SnapEDA_Link=https://www.snapeda.com/parts/FOXSDLF/128-20/Fox+Electronics/view-part/?ref=snap

## Via types
v1: diameter 0.8, hole 0.311, Top Layer to Bottom Layer, 28 vias
v2: diameter 1.27, hole 0.611, Top Layer to Bottom Layer, 23 vias
v3: diameter 0.7, hole 0.311, Top Layer to Bottom Layer, 8 vias
v4: diameter 0.727, hole 0.411, Top Layer to Bottom Layer, 6 vias
v5: diameter 0.8, hole 0.411, Top Layer to Bottom Layer, 3 vias
v6: diameter 1, hole 0.611, Top Layer to Bottom Layer, 2 vias
v7: diameter 0.8, hole 0.451, Top Layer to Bottom Layer, 2 vias
v8: diameter 0.7, hole 0.411, Top Layer to Bottom Layer, 1 vias

## Nets (pads, with @x,y where several pads share a name; then routed paths per layer and width w, separated by ;. In a path a pad name is that pad's centre, name@x,y a point inside that pad or via, vN(x,y) a via of type N, cw(c..) or ccw(c..) an arc to the next point about the centre after c; other vN are vias at no path point)
+5: C1.1 C2.1 J2.2 R20.1 VR1.2 | length 13.1
  Top Layer w0.54: VR1.2 31.75,30.009 31.75,33.528 C1.1 C2.1 31.798,36.401 31.798,38.656 R20.1 31.691,38.763 31.691,42.771 J2.2
+5DC: C5.1 C7.1 C12.1 C13.1 C14.1 C18.1 C19.1 C20.1 J2.1 J8.2 R3.1 R8.2 R9.2 R10.2 R11.2 R13.1 R14.1 R15.2 R18.2 R19.2 R20.2 R21.1 R24.2 R25.2 R33.2 R34.2 R38.2 R40.2 R41.2 R42.2 R56.2 T1.2 U1.8 U2.16 U3.7 U3.20 U4.8 | length 310.1
  Top Layer w0.4: C20.1 C20.1@35.748,85.344 ; R9.2 35.814,85.278 C20.1@35.748,85.344 ; v7(36.83,85.344) C20.1@35.748,85.344 ; v7(39.751,83.312) 50.038,83.312 ; C18.1@55.562,74.295 55.851,74.584 C18.1@55.851,74.676 ; R14.1@55.77,76.073 49.911,76.073 49.022,76.962 49.022,82.296 50.038,83.312 ; 80.264,65.532 80.264,82.042 78.994,83.312 50.038,83.312
  Top Layer w0.54: U1.8 6.126,43.561 6.096,43.531 6.096,40.64 7.046,39.69 C5.1 8.445,39.626 10.901,39.626 T1.2 11.165,39.563 13.136,37.592 17.526,37.592 18.396,38.462 18.396,38.684 R3.1 v2(26.035,38.989) ; 22.606,82.201 27.146,82.201 27.686,81.661 ; R21.1 24.432,51.991 26.114,51.991 v2(26.162,51.943) 28.702,51.943 30.48,53.721 30.48,56.703 C7.1 30.323,57.186 30.323,59.979 U2.16 ; U4.8 25.94,76.835 27.686,75.089 ; J2.1 34.115,42.751 34.115,38.783 R20.2 35.814,38.735 v2(35.941,38.862) ; R9.2 R8.2 29.02,83.376 27.686,82.042 27.686,81.661 ; R10.2 R11.2 28.67,74.104 27.686,75.089 ; R14.1 55.851,76.039 C18.1@55.851,74.676 ; U3.7 79.375,66.421 80.264,65.532 80.264,62.484 81.407,61.341 U3.20 88.138,61.341 89.789,62.992 C14.1 C13.1 C12.1 90.806,57.658 v6(88.9,57.658) ; R15.2 v2(99.314,38.989) 99.314,39.187 99.949,39.822 R56.2 ; 27.686,75.089 27.686,81.661
  Bottom Layer w0.4: v7(36.83,85.344) 37.719,85.344 v7(39.751,83.312)
  Bottom Layer w0.75: v2@26.035,51.943 v2(26.035,38.989) 26.162,38.862 v2(35.941,38.862) v2(43.053,38.862) v2(48.133,38.862) 48.197,38.925 54.419,38.925 v2(54.483,38.989) v2(59.563,38.989) 59.627,38.925 65.722,38.925 65.786,38.989 76.962,38.989 v2(77.089,38.862) v2(82.169,38.862) 82.233,38.925 88.328,38.925 v2(88.392,38.989) ; v2(99.314,38.989) v2(93.345,38.989) v2(88.392,38.989) ; J8.2@102.621,60.325 100.33,60.325 97.663,57.658 v6(88.9,57.658) 88.9,57.602 88.392,57.094 v2(88.392,38.989)
  other v2: 65.786,38.862 70.866,38.862
+12: C3.1 C4.1 D1.1 J6.4 R1.2 R5.1 VR1.3 | length 64
  Top Layer w0.74: R1.2 26.67,45.339 28.194,43.815 28.194,29.105 ; 29.464,27.813 30.099,27.178 R5.1
  Top Layer w2: D1.1 18.923,24.003 34.798,8.128 J6.4
DTR: C16.1 U2.13 | length 47.4
  Top Layer w0.4: v1(50.546,78.232) 50.609,78.295 55.882,78.295 C16.1
  Top Layer w0.54: U2.13 v2(26.543,61.976)
  Bottom Layer w0.4: v2(26.543,61.976) 26.709,62.142 27.125,62.142 27.212,62.23 50.292,62.23 50.546,62.484 v1(50.546,78.232)
Earthing: C_E.2 R53.1
EN: J8.3 R9.1 R10.1 U3.19 U4.2 U4.3 | length 104.4
  Top Layer w0.4: U4.2 30.15,78.74 ; U4.3 30.15,78.74 ; R10.1 35.941,78.105 35.306,78.74 ; v8(81.915,66.294) 81.915,82.042 79.629,84.328 39.116,84.328 R9.1 35.941,80.899 35.941,79.375 35.306,78.74 ; 30.15,78.74 35.306,78.74
  Top Layer w0.54: v6(97.409,59.69) 100.584,59.69 J8.3
  Bottom Layer w0.4: v8(81.915,66.294) 81.915,59.817 82.931,58.801 U3.19
  Bottom Layer w0.54: U3.19 85.471,59.69 v6(97.409,59.69)
GND: C1.2 C2.2 C3.2 C4.2 C5.2 C6.2 C7.2 C8.2 C9.2 C11.1 C12.2 C13.2 C14.2 C15.1 C17.2 C18.2 C19.2 C20.2 C21.1 C_E.1 D2.C D3.1 D4.1 D9.3 FB2.1 J1.1 J8.1 R2.1 R4.1 R6.1 R7.2 R52.1 R53.2 SW1.1 SW1.2 U1.4 U2.1 U3.8 U3.22 U4.5 U5.2 U5.4 U5.5 U5.7 U6.2 U6.4 U6.5 U6.7 U7.2 U7.4 U7.5 U7.7 U8.2 U8.4 U8.5 U8.7 U9.2 U9.4 U9.5 U9.7 U$1.2 U$1.3 VR1.1 | length 11.7
  Top Layer w0.54: FB2.1 8.036,51.851 10.436,51.851 10.724,51.562 v2(10.922,51.562) ; U1.4@10.922,47.401 10.952,47.371 U1.4 ; v1(15.367,78.74) D9.3 ; C3.2 C4.2 ; C2.2 v2(35.941,36.322) ; VR1.1@33.909,29.896 VR1.1 ; C18.2 v2(59.817,74.168)
  other v1: 23.495,32.639 25.4,32.639 24.511,34.163 28.194,48.26 29.718,49.149 31.369,50.038 28.194,50.165 29.845,51.054 31.369,51.943 60.198,68.58 61.722,68.58 8.382,76.327 9.652,76.327 10.922,76.327 8.382,78.74 9.652,78.74 10.922,78.74 8.382,81.153 9.652,81.153 10.922,81.153
  other v2: 16.764,68.58 18.415,68.58 19.939,68.58
  other v4: 51.716,68.785 49.339,69.977 49.371,73.406 51.721,73.406
NetC6_1: C6.1 R3.2 R4.2 U1.2 | length 10.6
  Top Layer w0.54: U1.2 13.335,44.831 14.986,43.18 C6.1 16.527,43.004 16.527,41.197 R4.2 R3.2
NetC8_1: C8.1 U2.4 | length 3.3
  Top Layer w0.54: C8.1@26.096,68.072 26.096,67.972 26.543,67.525 U2.4
NetC9_1: C9.1 FB1.1 R21.2 | length 5.3
  Top Layer w0.54: FB1.1 19.196,54.308 21.826,54.308 C9.1 21.893,54.339 24.335,54.339 R21.2
NetC10_2: C10.2 FB2.2 J3.A1B12 J3.B1A12 J3.SH3 J3.SH4 | length 7.4
  Top Layer w0.2: v3(5.08,59.055) 5.093,59.042 7.096,59.042 J3.B1A12 ; v3(5.08,65.405) 5.092,65.417 7.095,65.417 J3.A1B12
  Top Layer w0.54: v5(5.207,53.086) 6.256,53.086 ; FB2.2 6.256,51.976 6.256,53.086 ; C10.2 6.256,54.196 6.256,53.086
NetC17_1: C17.1 U3.21 | length 7.5
  Top Layer w0.3: U3.21 87.376,63.881 89.235,65.74 91.145,65.74 C17.1@91.245,65.84
NetD1_2: D1.2 J1.2 | length 8.4
  Top Layer w0.54: D1.2@18.76,32.893 D1.2
  Top Layer w1.54: J1.2 D1.2@18.76,32.893
NetD2_A: D2.A R5.2 | length 2.6
  Top Layer w0.54: R5.2 40.318,27.205 40.318,29.691 D2.A
NetD?_1: D9.2 J4.2 R12.2 R13.2 U4.6 | length 21
  Top Layer w0.54: R13.2 22.276,79.673 23.124,79.673 23.422,79.375 U4.6
  Top Layer w0.74: J4.2 5.715,81.178 6.978,79.915 R12.2 13.684,80.391 18.317,80.391 18.888,79.82 19.088,79.82 D9.2 19.348,79.82 20.128,79.82 20.286,79.978 R13.2
NetD?_2: D9.1 J4.1 R12.1 R52.2 U4.7 | length 21
  Top Layer w0.54: R52.2 22.276,77.807 23.124,77.807 23.422,78.105 U4.7
  Top Layer w0.74: J4.1 6.545,77.03 6.545,77.132 6.978,77.565 R12.1 13.684,77.089 18.317,77.089 18.888,77.66 19.088,77.66 D9.1 19.348,77.66 20.128,77.66 20.286,77.502 R52.2
NetF1_1: F1.1 T1.3 | length 12.2
  Top Layer w0.54: T1.3 13.309,40.513 13.539,40.743 13.539,41.987 v5(13.589,42.037) ; v5(13.589,49.784) F1.1
  Bottom Layer w0.54: v5(13.589,42.037) v5(13.589,49.784)
NetJ3_A5: J3.A5 R6.2 | length 8.2
  Top Layer w0.277: J3.A5 7.114,63.486 7.86,63.486 8.763,64.389 8.763,66.929 9.652,67.818 R6.2
NetJ3_B5: J3.B5 R7.1 | length 7.2
  Top Layer w0.277: J3.B5 8.227,60.48 9.398,59.309 9.398,57.785 9.779,57.404 11.779,57.404 R7.1
NetJ6_2: J6.3 R17.1 | length 12.2
  Top Layer w1: J6.3@43.053,8.128 R17.1
NetJ7_2: R22.1 U6.1 | length 2.6
  Top Layer w1: R22.1 U6.1
NetJ8_2: J13.1 R16.1 | length 13.2
  Top Layer w1: R16.1 98.044,9.906 J13.1@100.076,7.874
NetJ9_2: J6.2 R23.1 | length 12.2
  Top Layer w1: J6.2@48.26,8.128 R23.1
NetJ10_2: R29.1 U6.3 | length 2.7
  Top Layer w1: U6.3 70.866,25.178 70.993,25.051 R29.1
NetJ11_2: R31.1 U7.1 | length 2.7
  Top Layer w1: U7.1 88.328,25.209 88.328,22.701 R31.1
NetJ12_2: J9.1 R36.1 | length 12.7
  Top Layer w1: J9.1@76.327,7.874 J9.1 77.089,8.636 R36.1
NetJ13_2: J6.1 R37.1 | length 12.8
  Top Layer w1: J6.1 54.61,9.652 R37.1
NetJ14_2: R39.1 U7.3 | length 2.7
  Top Layer w1: U7.3 93.345,25.178 93.472,25.051 R39.1
NetJ15_2: J13.4 R46.1 | length 13.3
  Top Layer w1: R46.1 82.169,10.795 J13.4
NetJ16_2: R47.1 U9.3 | length 2.7
  Top Layer w1: U9.3 59.563,25.178 59.69,25.051 R47.1
NetR1_1: R1.1 R2.2 U1.3 | length 7.8
  Top Layer w0.54: U1.3 13.97,46.101 14.986,45.085 16.097,45.085 R1.1 R2.2
NetR15_1: R15.1 R26.2 U$1.4 | length 11.5
  Top Layer w0.54: U$1.4 R15.1
  Top Layer w0.75: R26.2@97.536,43.797 97.536,37.687 R15.1
NetR16_2: R16.2 U$1.1 | length 3.4
  Top Layer w1: R16.2 98.044,24.13 U$1.1
NetR17_2: R17.2 U5.1 | length 2.6
  Top Layer w1: R17.2 U5.1
NetR18_1: R18.1 R30.2 U5.6 | length 40.5
  Top Layer w0.54: R18.1 47.022,35.782 46.355,36.449 46.355,59.436 54.24,67.321 55.51,67.321 R30.2@55.626,67.437
  Top Layer w0.75: U5.6 R18.1
NetR19_1: R19.1 R27.2 U5.8 | length 43.4
  Top Layer w0.54: R19.1 44.291,35.655 44.958,36.322 44.958,60.198 54.356,69.596 R27.2@55.626,69.596
  Top Layer w0.75: U5.8 R19.1
NetR22_2: J9.3 R22.2 | length 12.4
  Top Layer w1: R22.2 65.786,8.763 J9.3
NetR23_2: R23.2 U5.3 | length 2.7
  Top Layer w1: U5.3 48.133,25.178 48.26,25.051 R23.2
NetR24_1: R24.1 R32.2 U6.6 | length 13.2
  Top Layer w0.54: U6.6 R24.1 71.075,35.991 72.251,35.991 73.025,36.765 73.025,42.132 R32.2
NetR25_1: R25.1 R28.2 U6.8 | length 13.2
  Top Layer w0.54: U6.8 R25.1 65.868,35.864 67.171,35.864 67.691,36.384 67.691,41.878 R28.2
NetR29_2: J9.2 R29.2 | length 12.4
  Top Layer w1: R29.2 70.993,8.636 J9.2
NetR31_2: J13.3 R31.2 | length 12.8
  Top Layer w1: R31.2 88.392,9.652 J13.3
NetR33_1: R33.1 R45.2 U7.6 | length 11.7
  Top Layer w0.54: U7.6 R33.1@93.345,35.655 ; R33.1 93.43,35.994 94.414,35.994 95.123,36.703 R45.2@95.123,43.561
NetR34_1: R34.1 R35.2 U7.8 | length 12.4
  Top Layer w0.54: U7.8 88.328,32.956 R34.1@88.328,35.592 ; R34.1@88.328,35.846 R34.1 88.666,36.183 89.777,36.183 90.932,37.338 R35.2@90.932,43.743
NetR36_2: R36.2 U8.1 | length 2.6
  Top Layer w1: R36.2 U8.1
NetR37_2: R37.2 U9.1 | length 2.7
  Top Layer w0.73: U9.1 54.546,25.209 54.546,22.701 R37.2
NetR38_1: R38.1 R48.2 U8.6 | length 12.3
  Top Layer w0.54: U8.6 R38.1@82.169,35.623 ; R38.1 82.169,36.036 83.534,36.036 84.582,37.084 R48.2@84.582,43.655
NetR39_2: J13.2 R39.2 | length 13.2
  Top Layer w1: R39.2 93.472,9.652 J13.2 J13.2@95.25,7.874
NetR40_1: R40.1 R49.2 U9.6 | length 12.8
  Top Layer w0.54: U9.6 R40.1 59.868,36.087 60.917,36.087 61.595,36.765 61.595,42.767 R49.2
NetR41_1: R41.1 R43.2 U8.8 | length 12.9
  Top Layer w0.54: R43.2 78.613,41.624 78.613,36.638 78.157,36.182 77.394,36.182 R41.1 U8.8
NetR42_1: R42.1 R44.2 U9.8 | length 33.5
  Top Layer w0.54: R42.1 54.788,36.087 55.137,36.087 56.007,36.957 56.007,65.119 R44.2
  Top Layer w0.75: U9.8 R42.1
NetR46_2: R46.2 U8.3 | length 2.6
  Top Layer w1: R46.2 U8.3
NetR47_2: J9.4 R47.2 | length 12.8
  Top Layer w1: R47.2 59.69,9.779 J9.4
NetT1_1: T1.1 U1.1 | length 2.2
  Top Layer w0.54: T1.1 10.965,43.531 10.995,43.561 U1.1
R\S\T\\: C16.2 R14.2 SW1.3 SW1.4 U3.1 | length 30
  Top Layer w0.3: SW1.3 SW1.4 57.987,78.5 C16.2 58.039,78.166 R14.2 ; SW1.4@58.205,81.407 76.408,81.407 U3.1
RX_P: J5.01 U2.2 U3.2 | length 63.4
  Top Layer w0.4: U2.2 29.083,68.199 30.734,69.85 v4(42.926,69.85) ; J5.01 43.18,74.422 v4(45.339,72.263) 61.595,72.263 63.881,74.549 63.881,77.851 65.151,79.121 U3.2
  Bottom Layer w0.4: v4(42.926,69.85) v4(45.339,72.263)
RXD1: J5.02 J7.01 R11.1 U4.1 | length 23.1
  Top Layer w0.54: U4.1 30.867,76.835 30.87,76.832 30.87,76.774 31.19,76.454 R11.1 v2(33.655,77.343) ; J5.02 40.64,72.814 41.275,72.179 v3(41.275,72.136)
  Bottom Layer w0.54: v2(33.655,77.343) 33.718,77.406 40.576,77.406 J5.02 ; v3(41.275,72.136) 41.306,72.105 41.306,66.742 J7.01
SNR1: R27.1 U3.4 | length 20.4
  Top Layer w0.54: R27.1 63.246,69.723 66.421,72.898 75.519,72.898 U3.4
SNR2: R30.1 U3.5 | length 20.4
  Top Layer w0.54: R30.1@57.99,67.437 62.611,67.437 66.421,71.247 75.846,71.247 75.908,71.31 76.471,71.31 U3.5
SNR3: R44.1 U3.6 | length 21.3
  Top Layer w0.54: R44.1@57.785,65.278 61.976,65.278 66.802,70.104 75.519,70.104 U3.6
SNR4: R49.1 U3.11 | length 22.4
  Top Layer w0.54: R49.1 63.214,48.768 71.247,48.768 74.041,51.562 74.041,55.245 75.057,56.261 U3.11
SNR5: R28.1 U3.12 | length 15.1
  Top Layer w0.55: R28.1 67.532,47.879 71.755,47.879 75.057,51.181 75.057,53.086 75.692,53.721 U3.12
SNR6: R32.1 U3.13 | length 7.4
  Top Layer w0.54: R32.1 76.422,51.181 U3.13
SNR7: R43.1 U3.14 | length 2.6
  Top Layer w0.75: R43.1 76.558,46.237 76.558,48.537 U3.14
SNR8: R48.1 U3.15 | length 2.5
  Top Layer w0.75: R48.1 U3.15
SNR9: C21.2 J7.04 J8.6 R35.1 R56.1 U3.16 | length 102.4
  Top Layer w0.54: J7.04 39.115,60.75 39.624,60.241 v3(39.624,60.198) ; U3.16 88.773,51.181 90.932,49.022 R35.1 ; R56.1 100.031,46.051 102.28,46.051 C21.2 102.425,46.033 102.425,50.102 J8.6
  Bottom Layer w0.54: v3(39.624,60.198) 39.624,45.339 43.688,41.275 80.645,41.275 82.55,43.18 82.55,49.149 U3.16 ; v3(89.916,50.165) J8.6
SNR10: J7.02 J8.5 R45.1 U3.17 | length 97.6
  Top Layer w0.54: v3(41.275,60.198) 41.275,60.241 41.655,60.622 J7.02 ; U3.17@84.328,53.594 92.202,53.594 v3(93.091,52.705) 94.869,50.927 R45.1
  Bottom Layer w0.54: v3(41.275,60.198) 41.275,45.847 44.958,42.164 79.883,42.164 81.407,43.688 81.407,50.546 U3.17 ; v3(93.091,52.705) J8.5
SNR11: J8.4 R26.1 U3.18 | length 30.1
  Top Layer w0.54: U3.18 93.599,56.261 ; R26.1 97.536,52.324 93.599,56.261 ; J8.4 102.209,55.245 101.193,56.261 93.599,56.261
TX_N: J5.03 U2.3 U3.3 | length 67.2
  Top Layer w0.4: U2.3 27.813,68.834 30.099,71.12 44.196,71.12 ; J5.03 41.91,78.74 41.91,73.406 44.196,71.12 ; U3.3 66.04,76.581 65.151,75.692 65.151,74.168 62.103,71.12 44.196,71.12
TXD1: J5.04 J7.03 R8.1 U4.4 | length 26.1
  Top Layer w0.54: U4.4 30.867,80.645 30.87,80.648 30.87,80.706 31.19,81.026 R8.1 v2(33.528,80.01) ; v3(38.989,72.136) 38.989,78.359 J5.04
  Bottom Layer w0.54: v2(33.528,80.01) J5.04 ; v3(38.989,72.136) 39.052,72.073 39.052,66.455 J7.03
USBD_N: D4.2 J3.A7 J3.B7 R51.1 | length 10.8
  Top Layer w0.277: J3.A7 6.131,61.98 5.969,62.142 5.969,62.818 6.131,62.98 J3.B7 7.118,62.97 7.821,62.97 7.859,62.932 9.589,62.932 9.829,62.693 11.466,62.693 11.629,62.855 11.629,63.064 R51.1 ; R51.1@12.033,63.5 12.033,65.627 D4.2
USBD_P: D3.2 J3.A6 J3.B6 R50.1 | length 9.7
  Top Layer w0.277: J3.B6 7.118,61.49 7.966,61.49 8.128,61.653 8.128,62.307 7.966,62.47 ; J3.A6@7.118,62.47 J3.A6 7.118,62.49 7.821,62.49 7.859,62.528 9.422,62.528 9.661,62.289 11.434,62.289 11.597,62.126 11.597,61.904 R50.1 D3.2
V_USBD_N: R51.2 U2.6 | length 12.4
  Top Layer w0.277: R51.2 14.851,63.064 14.851,62.842 15.014,62.679 23.395,62.679 24.436,63.721 24.436,63.95 24.274,64.113 24.164,64.113 24.003,64.274 U2.6
V_USBD_P: R50.2 U2.5 | length 13.1
  Top Layer w0.277: R50.2 14.819,61.904 14.819,62.113 14.982,62.275 23.562,62.275 24.84,63.553 24.84,63.95 25.002,64.113 25.112,64.113 25.273,64.274 U2.5
VUSB: C10.1 F1.2 FB1.2 J3.A4B9 J3.B4A9 | length 29.8
  Top Layer w0.4: J3.A4B9 5.448,64.63 4.826,64.008 4.826,60.452 5.448,59.83 J3.B4A9 7.203,59.735 7.839,59.735 8.382,59.192 C10.1@8.382,54.422 ; C10.1 8.443,54.483 10.541,54.483 12.017,53.007 18.642,53.007 18.894,52.755 FB1.2@18.894,52.324
  Top Layer w0.54: F1.2 19.122,49.839 19.122,52.324 19.122,52.552 FB1.2
XTAL1: C11.2 U3.9 Y1.1 | length 14.3
  Top Layer w0.54: C11.2 68.866,63.114 Y1.1@69.596,63.844 ; Y1.1 Y1.1@69.596,63.844 ; U3.9@76.835,61.214 71.374,61.214 70.326,62.262 70.326,63.114 Y1.1@69.596,63.844
XTAL2: C15.2 U3.10 Y1.2 | length 14
  Top Layer w0.54: C15.2 68.866,57.089 Y1.2@69.596,56.359 ; Y1.2 Y1.2@69.596,56.359 ; U3.10@76.708,58.674 71.374,58.674 70.501,57.801 70.326,57.801 69.596,57.071 Y1.2@69.596,56.359
pads on no net: Designator7.1 Designator8.1 Designator9.1 Designator10.1 Designator12.2 J3.A8 J3.B8 J3.SH1 J3.SH2 R54.1 R54.2 R55.1 R55.2 U1.5 U1.6 U1.7 U2.7 U2.8 U2.9 U2.10 U2.11 U2.12 U2.14 U2.15 U3.23 U3.24 U3.25 U3.26 U3.27 U3.28 VR1.4
copper on no net:
  other v1: 62.23,51.689 64.135,51.689 60.452,51.816 63.246,53.213 59.563,53.34 61.468,53.34

## Polygon pours and split planes (outlines as drawn)
GND on Bottom Layer "GND_L02_P018" (solid, pour order 18): 36.101,8.001 36.142,7.96 36.195,8.013 36.195,14.097 20.447,14.097 20.447,8.001
GND on Bottom Layer "GND_L02_P016" (solid, pour order 16): 0,13.97 9.144,13.97 11.938,11.176 14.859,11.176 18.034,8.001 20.828,8.001 20.828,24.765 39.116,24.765 39.116,29.845 103.124,29.845 104.902,31.623 105.029,31.623 105.029,87.249 3.81,87.249 3.683,87.122 3.683,72.009 13.716,72.009 13.716,56.007 12.954,55.245 9.906,55.245 9.906,48.895 9.652,48.641 0,48.641
GND on Bottom Layer "GND_L02_P011" (solid, pour order 11): 102.856,27.701 105.523,25.034 105.523,8.143 101.84,4.46 35.8,4.46 35.8,14.239 41.642,20.081 41.642,27.701
Earthing on Bottom Layer "EARTHING_L02_P004" (solid, pour order 4): 1.905,13.033 8.674,13.033 10.96,10.747 14.516,10.747 18.961,6.302 18.961,1.27 1.905,1.27
NetC10_2 on Bottom Layer "NETC10_2_L02_P002" (solid, pour order 2): 4.318,50.165 7.112,50.165 7.112,56.007 12.827,56.007 12.827,69.088 4.318,69.088 4.318,61.849
GND on Top Layer "GND_L01_P014" (solid, pour order 14): 47.371,87.249 47.371,64.897 43.18,60.706 43.18,43.942 40.64,41.402 40.64,31.496 42.418,29.718 103.124,29.718 105.537,32.131 105.537,87.249
GND on Top Layer "GND_L01_P017" (solid, pour order 17): 14.732,11.176 18.034,7.874 20.828,7.874 20.828,15.494 9.017,15.494 9.017,13.97 11.811,11.176 11.938,11.176
GND on Top Layer "GND_L01_P013" (solid, pour order 13): 24.384,35.687 22.225,33.528 22.225,29.972 26.543,29.972 26.543,33.528
GND on Top Layer "GND_L01_P008" (solid, pour order 8): 3.81,87.249 37.592,87.249 37.592,72.136 3.81,72.136
GND on Top Layer "GND_L01_P010" (solid, pour order 10): 102.87,27.686 105.537,25.019 105.537,8.128 101.854,4.445 35.814,4.445 35.814,14.224 41.656,20.066 41.656,27.686
Earthing on Top Layer "EARTHING_L01_P003" (solid, pour order 3): 1.905,12.954 8.763,12.954 11.049,10.668 14.605,10.668 19.05,6.223 19.05,1.27 1.905,1.27
GND on Top Layer "GND_L01_P009" (solid, pour order 9): 4.318,48.641 9.906,48.641 9.906,55.372 13.589,55.372 13.716,55.499 13.716,70.231 32.258,70.231 32.258,44.196 36.195,44.196 39.116,41.275 39.116,25.146 34.544,25.146 32.893,26.797 32.893,31.496 25.146,39.243 4.318,39.243

## Keep-outs
Keep-Out Layer:
  the board outline again, w0.5

## Other copper
Top Layer:
  region net +12: 17.272,30.226 20.574,30.226 21.209,29.591 26.416,29.591 27.686,30.861 29.972,30.861 29.972,26.67 17.272,26.67
  region net NetC10_2: 5.207,53.147 5.207,53.025 6.256,51.976 6.272,51.992 6.272,54.213

## Silkscreen, mask and mechanical layers (free items; w line width, h text height)
Top Overlay:
  circle w0.254: c31.496,76.454 r0.127
  lines w0.25: 39.37,78.74 44.45,78.74 ; 40.385,62.582 40.385,67.662
  lines w0.54: 43.18,23.749 cw(c43.053,23.876) 43.233,23.876 ; 48.387,23.749 cw(c48.26,23.876) 48.44,23.876 ; 54.737,23.749 cw(c54.61,23.876) 54.79,23.876 ; 59.817,23.622 cw(c59.69,23.749) 59.87,23.749 ; 65.913,23.749 cw(c65.786,23.876) 65.966,23.876 ; 71.12,23.749 cw(c70.993,23.876) 71.173,23.876 ; 74.963,81.647 cw(c74.803,81.788) 75.016,81.774 ; 77.216,23.749 cw(c77.089,23.876) 77.269,23.876 ; 78.981,82.421 ccw(c80.772,83.185) 82.531,82.351 ; 82.296,23.749 cw(c82.169,23.876) 82.349,23.876 ; 88.519,23.876 cw(c88.392,24.003) 88.572,24.003 ; 93.599,23.749 cw(c93.472,23.876) 93.652,23.876 ; 99.441,23.876 cw(c99.314,24.003) 99.494,24.003
  text "A" at 5.588,84.963 h1.52
  text "RS485" at 10.795,84.963 h1.52
  text "TX" at 38.862,81.788 h1.52
  text "RX" at 39.497,74.041 h1.52
  text "B" at 5.461,71.755 h1.52
  text "D10" at 33.147,62.992 h1.52
  text "D11" at 43.942,62.992 h1.52
  text "D10" at 7.62,48.006 h1.52
  text "D11" at 13.843,48.006 h1.52
  text "12VDC" at 7.366,36.83 h1.52
  text "GND" at 8.509,22.86 h1.52
  text "12V" at 35.306,15.113 h1.52
  text "D2" at 41.656,14.859 h1.52
  text "D3" at 47.117,14.859 h1.52
  text "D4" at 52.705,14.859 h1.52
  text "D5" at 60.198,14.859 h1.52
  text "D6" at 65.405,14.859 h1.52
  text "D7" at 70.358,14.859 h1.52
  text "D8" at 75.946,14.859 h1.52
  text "D9" at 83.312,14.859 h1.52
  text "D10" at 87.122,14.859 h1.52
  text "D11" at 92.456,14.859 h1.52
  text "D12" at 97.663,14.732 h1.52
Bottom Overlay:
  text "GND" at 100.457,62.103 h1.52
  text "5V" at 100.457,59.563 h1.52
  text "SCK(D13)" at 100.711,57.15 h1.52
  text "MISO(D12)" at 100.457,54.61 h1.52
  text "MOSI(D11)" at 100.457,52.07 h1.52
  text "RST(D10)" at 100.457,49.276 h1.52